# Altium PCB 2LED_RGB.PcbDoc
Units mm, origin at the board's own origin, x right, y up, seen from the top; angles counter-clockwise.
Board outline 28.07 x 16.76 mm, 2 copper layers (Top Layer, Bottom Layer); 14 components, 15 nets, 45 pads, 0 vias.
Unrouted connection lines stored in the file: 15.
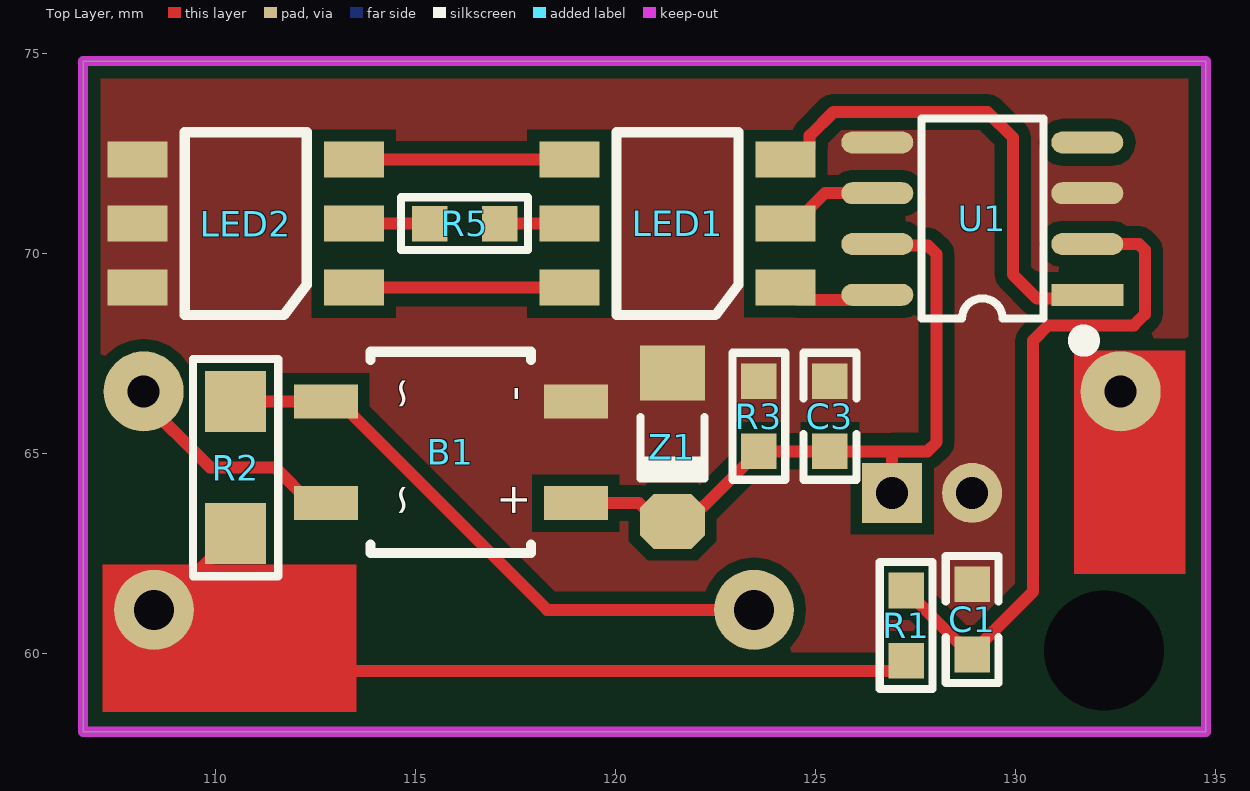
[diagram p0: Top Layer view]
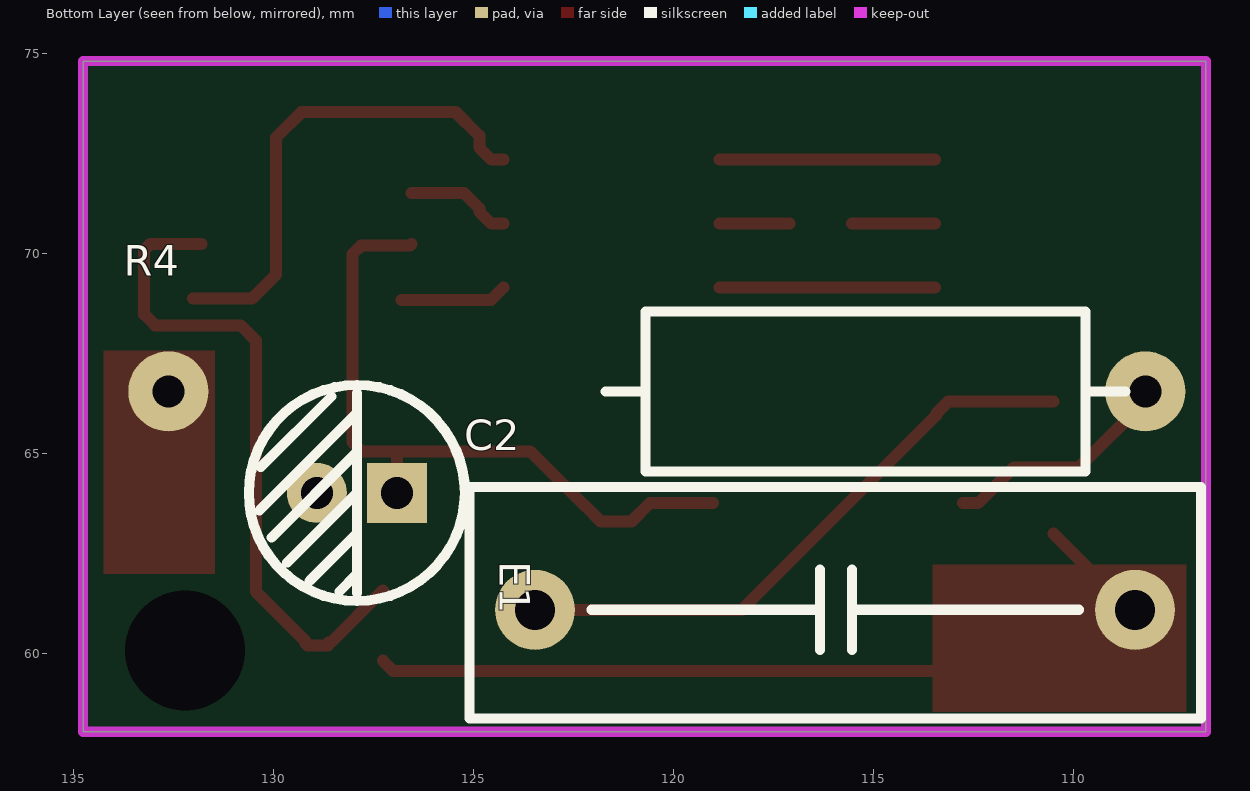
[diagram p1: Bottom Layer view, seen from below]
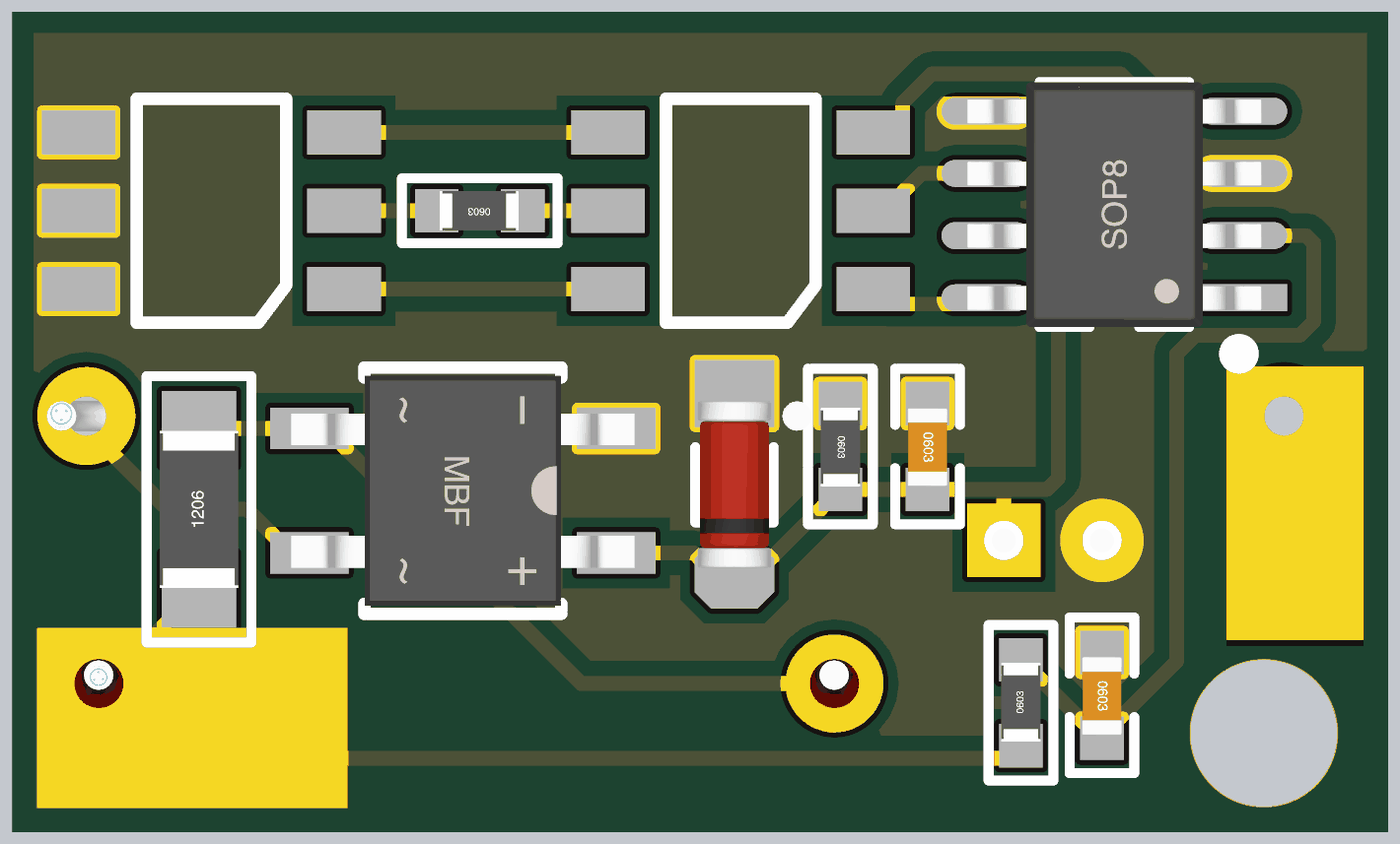
[diagram p2: 3D render of the assembled board from above, using the file's embedded part models]
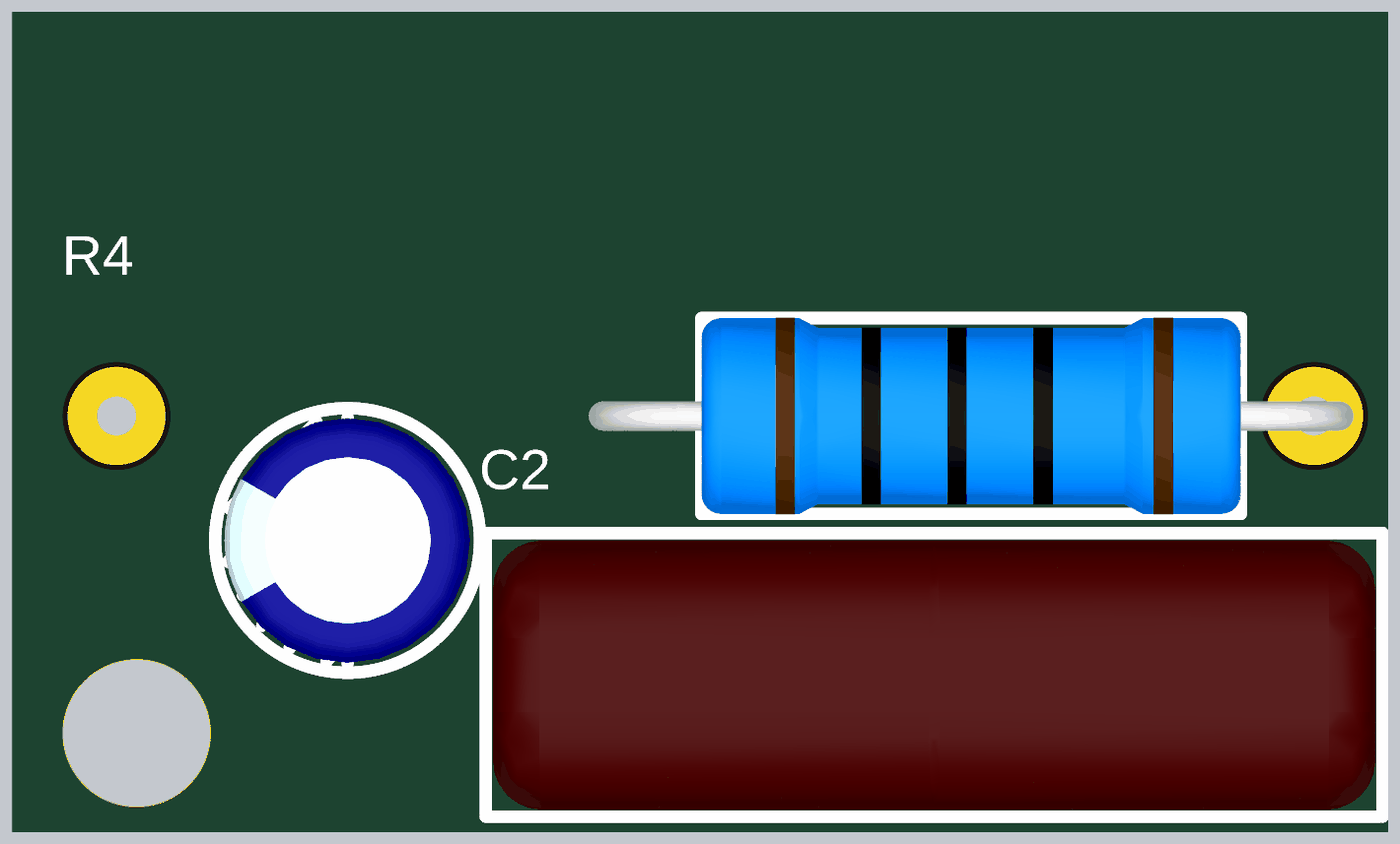
[diagram p3: 3D render of the assembled board from below, using the file's embedded part models]

## Layer stack, top to bottom
Top Solder: solder mask 0.0102, Solder Resist, Dk 3.5
Top Layer: signal copper 0.0356
Dielectric 1: dielectric 0.32, FR-4, Dk 4.8
Bottom Layer: signal copper 0.0356
Bottom Solder: solder mask 0.0102, Solder Resist, Dk 3.5

## Board outline
106.68,58.039 106.68,74.803 134.747,74.803 134.747,58.039

## Design rules (kind name [scope] priority, off if disabled: settings)
Clearance [All] p1: gap=0.3 ignorepadtopadclearanceinfootprint=FALSE
ComponentClearance [All] p1 off: gap=0.254 collisioncheckmode=3 verticalgap=0.254 showdistances=FALSE
PolygonConnect PolygonConnect_2 [All vs IsNamedPolygon('H_L01_P001')] p1: connectstyle=Direct reliefconductorwidth=0.254 reliefentries=4 polygonreliefangle="90 Angle" airgapwidth=0.254
PolygonConnect PolygonConnect_1 [All vs IsNamedPolygon('NONET_L01_P000')] p2: connectstyle=Direct reliefconductorwidth=0.254 reliefentries=4 polygonreliefangle="90 Angle" airgapwidth=0.254
PolygonConnect [All] p3: connectstyle=Relief reliefconductorwidth=0.254 reliefentries=4 polygonreliefangle="90 Angle" airgapwidth=0.254
RoomDefinition Main [InComponentClass('Main')] p1: confinementstyle=ConfineIn formatcopy=TRUE lockcomponents=FALSE outline 106.299,57.912 133.985,57.912 133.985,74.041 106.299,74.041
RoutingVias [All] p1: holewidth=0.711 width=1.27 viastyle="Through Hole" minholewidth=0.711 minwidth=1.27 maxholewidth=0.711 maxwidth=1.27
SolderMaskExpansion [All] p1: expansion=0.102 istentingtop=FALSE
Width [All] p1: maxlimit=1 minlimit=0.3 preferedwidth=0.5
29 further rules are at their usual default settings.

## Components (designator, comment, footprint, x,y, rotation, side; value= is the part's Value field where it differs from the comment)
B1 "MB10F" MBF 115.872,65.024 r0 top
C1 "103" "C 0603" 128.905,60.833 r270 top
C2 "0.47uF/630V" "CBB 15*18*11" 115.951,61.087 r0 bottom
C3 "104" "C 0603" 125.349,65.913 r270 top
E1 "47uF" "CAP 2.0*5*11" 127.905,64.008 r0 bottom
LED1 "LED-RGB" "LED 5050" 121.539,70.739 r180 top
LED2 "LED-RGB" "LED 5050" 110.744,70.739 r180 top
R1 "2M" "R 0603" 127.254,60.706 r90 top
R2 "470K" "R 1206" 110.49,64.643 r90 top
R3 "20K" "R 0603" 123.571,65.913 r270 top
R4 "100/3W" "RS 1W" 115.189,66.548 r180 bottom
R5 "100" "R 0603" 116.205,70.739 r180 top
U1 "24Cxx" SOP8_N 129.159,70.866 r180 top
Z1 "1N4619" "MINI_MELF (LL34)" 121.412,65.151 r270 top

## Footprints (in the part's own frame and the unit in brackets; to place one, negate y for a bottom-side part, rotate by r counter-clockwise, add the part's x,y. Pads: shape width x height; smd on the part's side, far side on the other; paste and mask are expansions set on the pad)
"C 0603" [mil] "ï؟½ق¼ï؟½ï؟½ï؟½ï؟½ï؟½ئ¬ï؟½ï؟½ï؟½ï؟½"
  rect 35x35 smd: 1(-35,0) 2(34,0)
  silkscreen extent -63,-26 62,26, body extent -31,-16 31,16, height 32
"CAP 2.0*5*11" [mm] "ï؟½إ¾ï؟½2mmض±ï؟½ï؟½5mmï؟½ك¶ï؟½11mm"
  rect 1.5x1.5 hole 0.8: 1(-1,0)
  round 1.5 hole 0.8: 2(1,0)
  silkscreen extent -2.7,-2.7 2.7,2.7, body extent -2.5,-2.5 2.51,2.5, height 11.04
"CBB 15*18*11" [mm] "ï؟½إ¾ï؟½15mmï؟½ï؟½18mmï؟½ï؟½11mm"
  round 2 hole 1: 1(-7.5,0) 2(7.5,0)
  silkscreen extent -9.15,-3.07 9.14,2.72, body extent -9.01,-2.92 8.99,2.58, height 11.53
"LED 5050" [mm] "ï؟½ï؟½ة«5050LED"
  rect 1.5x0.9 smd: 1(-2.705,1.6) 2(-2.705,0) 3(-2.705,-1.6) 4(2.705,-1.6) 5(2.705,0) 6(2.705,1.6)
  silkscreen extent -1.52,-2.29 1.52,2.29, body extent -2.7,-2.5 2.7,2.5, height 1.65
MBF [mm] "4.7*7*1.5mm(³¤؟ي¸ك)"
  rect 1.6x0.85 smd: AC1(-3.127,1.27) AC2(-3.127,-1.27) DC+(3.127,-1.27) DC-(3.127,1.27)
  silkscreen extent -2.01,-2.51 2.01,2.51, body extent -3.5,-2.35 3.5,2.35, height 1.6
"MINI_MELF (LL34)" [mm] "1.5*3.4mm(ض±¾¶£¬½إ¾à£©"
  rect 1.37x1.62 smd: 1(-1.855,0)
  oct 1.37x1.62 smd: 2(1.855,0)
  silkscreen extent -0.76,-0.8 0.78,0.8, body extent -1.7,-0.75 1.7,0.75, height 1.5
"R 0603" [mil] "1/10Wï؟½ï؟½ئ¬ï؟½ï؟½ï؟½ï؟½"
  rect 35x35 smd: 1(-35,0) 2(34,0)
  silkscreen extent -63,-26 62,26, body extent -31,-16 32,16, height 16
"R 1206" [mil] "1/4Wï؟½ï؟½ئ¬ï؟½ï؟½ï؟½ï؟½"
  rect 60x60 smd: 1(-65,0) 2(65,0)
  silkscreen extent -107,-42 107,42, body extent -63,-31 63,32, height 22
"RS 1W" [mm] "ض±ï؟½ï؟½ة«ï؟½ï؟½ï؟½ï؟½ï؟½è£¬ï؟½إ¾ï؟½15mmï؟½ï"
  round 2 hole 0.8: 1(-17.428,0) 2(6.995,0)
  silkscreen extent -6.5,-2 6.5,2, body extent -7.8,-2.01 7.8,2.01, height 4.11
SOP8_N [mm] "5*6*1.8mm£¨³¤؟ي¸ك£©"
  rect 1.8x0.55 smd: 1(-2.625,1.905)
  oval 1.8x0.55 smd: 2(-2.625,0.635) 3(-2.625,-0.635) 4(-2.625,-1.905) 5(2.625,-1.905) 6(2.625,-0.635) 7(2.625,0.635) 8(2.625,1.905)
  silkscreen extent -2.69,-2.5 1.52,3.2, body extent -3,-2.5 3,2.5, height 1.9

## Part data
B1: "1KV/0.8A rectifier bridge", BOM名称=1KV/0.8A整流桥, 学习资源=www.ooocke.com, 版权归属=源创客
C1 C3: library part C, "Non-polar patch capacitor", BOM名称=无极性贴片电容, 学习资源=www.ooocke.com, 版权归属=源创客
C2: library part C-CBB, "CBB capacitor", BOM名称=CBB电容, 学习资源=www.ooocke.com, 版权归属=源创客
E1: library part C-CAP, "Inline electrolytic capacitor", BOM名称=直插电解电容, 学习资源=www.ooocke.com, 版权归属=源创客
LED1 LED2: "Three primary color LED", BOM名称=三基色LED, 学习资源=www.ooocke.com, 版权归属=源创客
R1 R2 R3 R5: library part R, "Chip resistor", BOM名称="Chip resistor", 学习资源=www.ooocke.com, 版权归属=源创客
R4: library part R-CRR, "Straight color ring resistor", BOM名称=色环电阻, 学习资源=www.ooocke.com, 版权归属=源创客
U1: "Two-wire Serial EEPROM", BOM名称=外置EEPROM, 学习资源=www.ooocke.com, 版权归属=源创客
Z1: "3V/0.5W voltage regulator", BOM名称=3V/0.5W稳压管, 学习资源=www.ooocke.com, 版权归属=源创客

## Free pads (board coordinates)
  round 0 hole 3: 15(132.207,60.071)

## Nets (pads, with @x,y where several pads share a name; then routed paths per layer and width w, separated by ;. In a path a pad name is that pad's centre, name@x,y a point inside that pad or via, vN(x,y) a via of type N, cw(c..) or ccw(c..) an arc to the next point about the centre after c; other vN are vias at no path point)
FASE: C2.1 R1.1 R2.1 | length 22.3
  Top Layer w0.3: C2.1 108.585,61.087 R2.1 ; C2.1@108.518,61.02 109.975,59.563 127,59.563 R1.1
FIN: C1.2 R1.2 U1.2 | length 16.8
  Top Layer w0.3: R1.2 128.56,60.264 128.61,60.264 128.626,60.249 128.626,60.198 128.791,60.198 129.134,60.198 129.2,60.264 129.2,60.315 130.429,61.545 130.429,67.818 130.81,68.199 132.947,68.199 133.223,68.475 133.223,70.082 133.074,70.231 U1.2
H: B1.DC- C1.1 C3.1 E1.2 LED2.4 LED2.5 LED2.6 R3.1 U1.3 U1.5 Z1.1
L: U1.4
NetB1_AC1: B1.AC1 C2.2 R2.2 | length 15.1
  Top Layer w0.3: R2.2 B1.AC1 113.12,66.294 113.418,65.996 113.418,65.951 118.282,61.087 123.243,61.087 C2.2@123.37,60.96
NetB1_AC2: B1.AC2 R4.2 | length 5.8
  Top Layer w0.3: R4.2@108.077,66.421 109.855,64.643 111.481,64.643 112.37,63.754 B1.AC2
NetLED1_4: LED1.4 LED2.3 | length 5.4
  Top Layer w0.3: LED2.3 LED1.4
NetLED1_5: LED1.5 R5.1 | length 1.7
  Top Layer w0.3: R5.1 LED1.5
NetLED1_6: LED1.6 LED2.1 | length 5.4
  Top Layer w0.3: LED2.1 LED1.6
NetLED2_2: LED2.2 R5.2 | length 2.1
  Top Layer w0.3: LED2.2 R5.2@115.53,70.739
NULL: R4.1
Q1: LED1.3 U1.1 | length 12.4
  Top Layer w0.3: LED1.3 124.544,72.339 124.844,72.639 124.844,72.939 125.438,73.533 129.286,73.533 129.921,72.898 129.921,69.469 130.525,68.865 U1.1@132.007,68.865
Q2: LED1.1 U1.8 | length 2.7
  Top Layer w0.3: LED1.1 124.549,68.834 U1.8@126.788,68.834
Q3: LED1.2 U1.6 | length 2.7
  Top Layer w0.3: LED1.2 124.544,70.739 124.844,71.039 124.844,71.123 125.222,71.501 U1.6
VCC: B1.DC+ C3.2 E1.1 R3.2 U1.7 Z1.2 | length 17.4
  Top Layer w0.3: B1.DC+ 120.58,63.754 121.038,63.296 121.805,63.296 122.194,63.685 122.206,63.685 R3.2 124.714,65.049 C3.2 126.873,65.049 ; U1.7 126.572,70.193 127.8,70.193 128.016,69.977 128.016,65.278 127.787,65.049 126.873,65.049 ; E1.1 126.905,65.017 ccw(c126.873,65.017) 126.873,65.049

## Polygon pours and split planes (outlines as drawn)
H on Top Layer "H_L01_P001" (solid, remove dead copper, pour order 1): 106.68,58.039 134.747,58.039 134.747,74.803 106.68,74.803

## Keep-outs
Keep-Out Layer:
  the board outline again, w0.254

## Other copper
Top Layer:
  rectangle net NULL: 131.445,61.976 134.239,67.564
  rectangle net FASE: 107.168,58.537 113.518,62.22

## Silkscreen, mask and mechanical layers (free items; w line width, h text height)
Top Solder:
  rectangle: 131.445,61.849 134.239,67.564
  rectangle: 107.188,58.547 113.538,62.23

## Text inside footprints (layer, text, board x,y; h text height)
B1: Top Overlay "~" at 115.237,66.929 h1.3 r90; Top Overlay "~" at 115.237,64.262 h1.3 r90; Top Overlay "-" at 118.031,66.675 h1.3 r90; Top Overlay "+" at 118.031,64.262 h1.3 r90